# Altium PCB PCI short card universal - 32 BIT.PCBDOC (part 4 of 4)
Units mm, origin at the board's own origin, x right, y up, seen from the top; angles counter-clockwise.
Board outline 174.62 x 106.68 mm, 4 copper layers (TopLayer, MidLayer2, MidLayer3, BottomLayer); 200 components, 306 nets, 1120 pads, 510 vias.
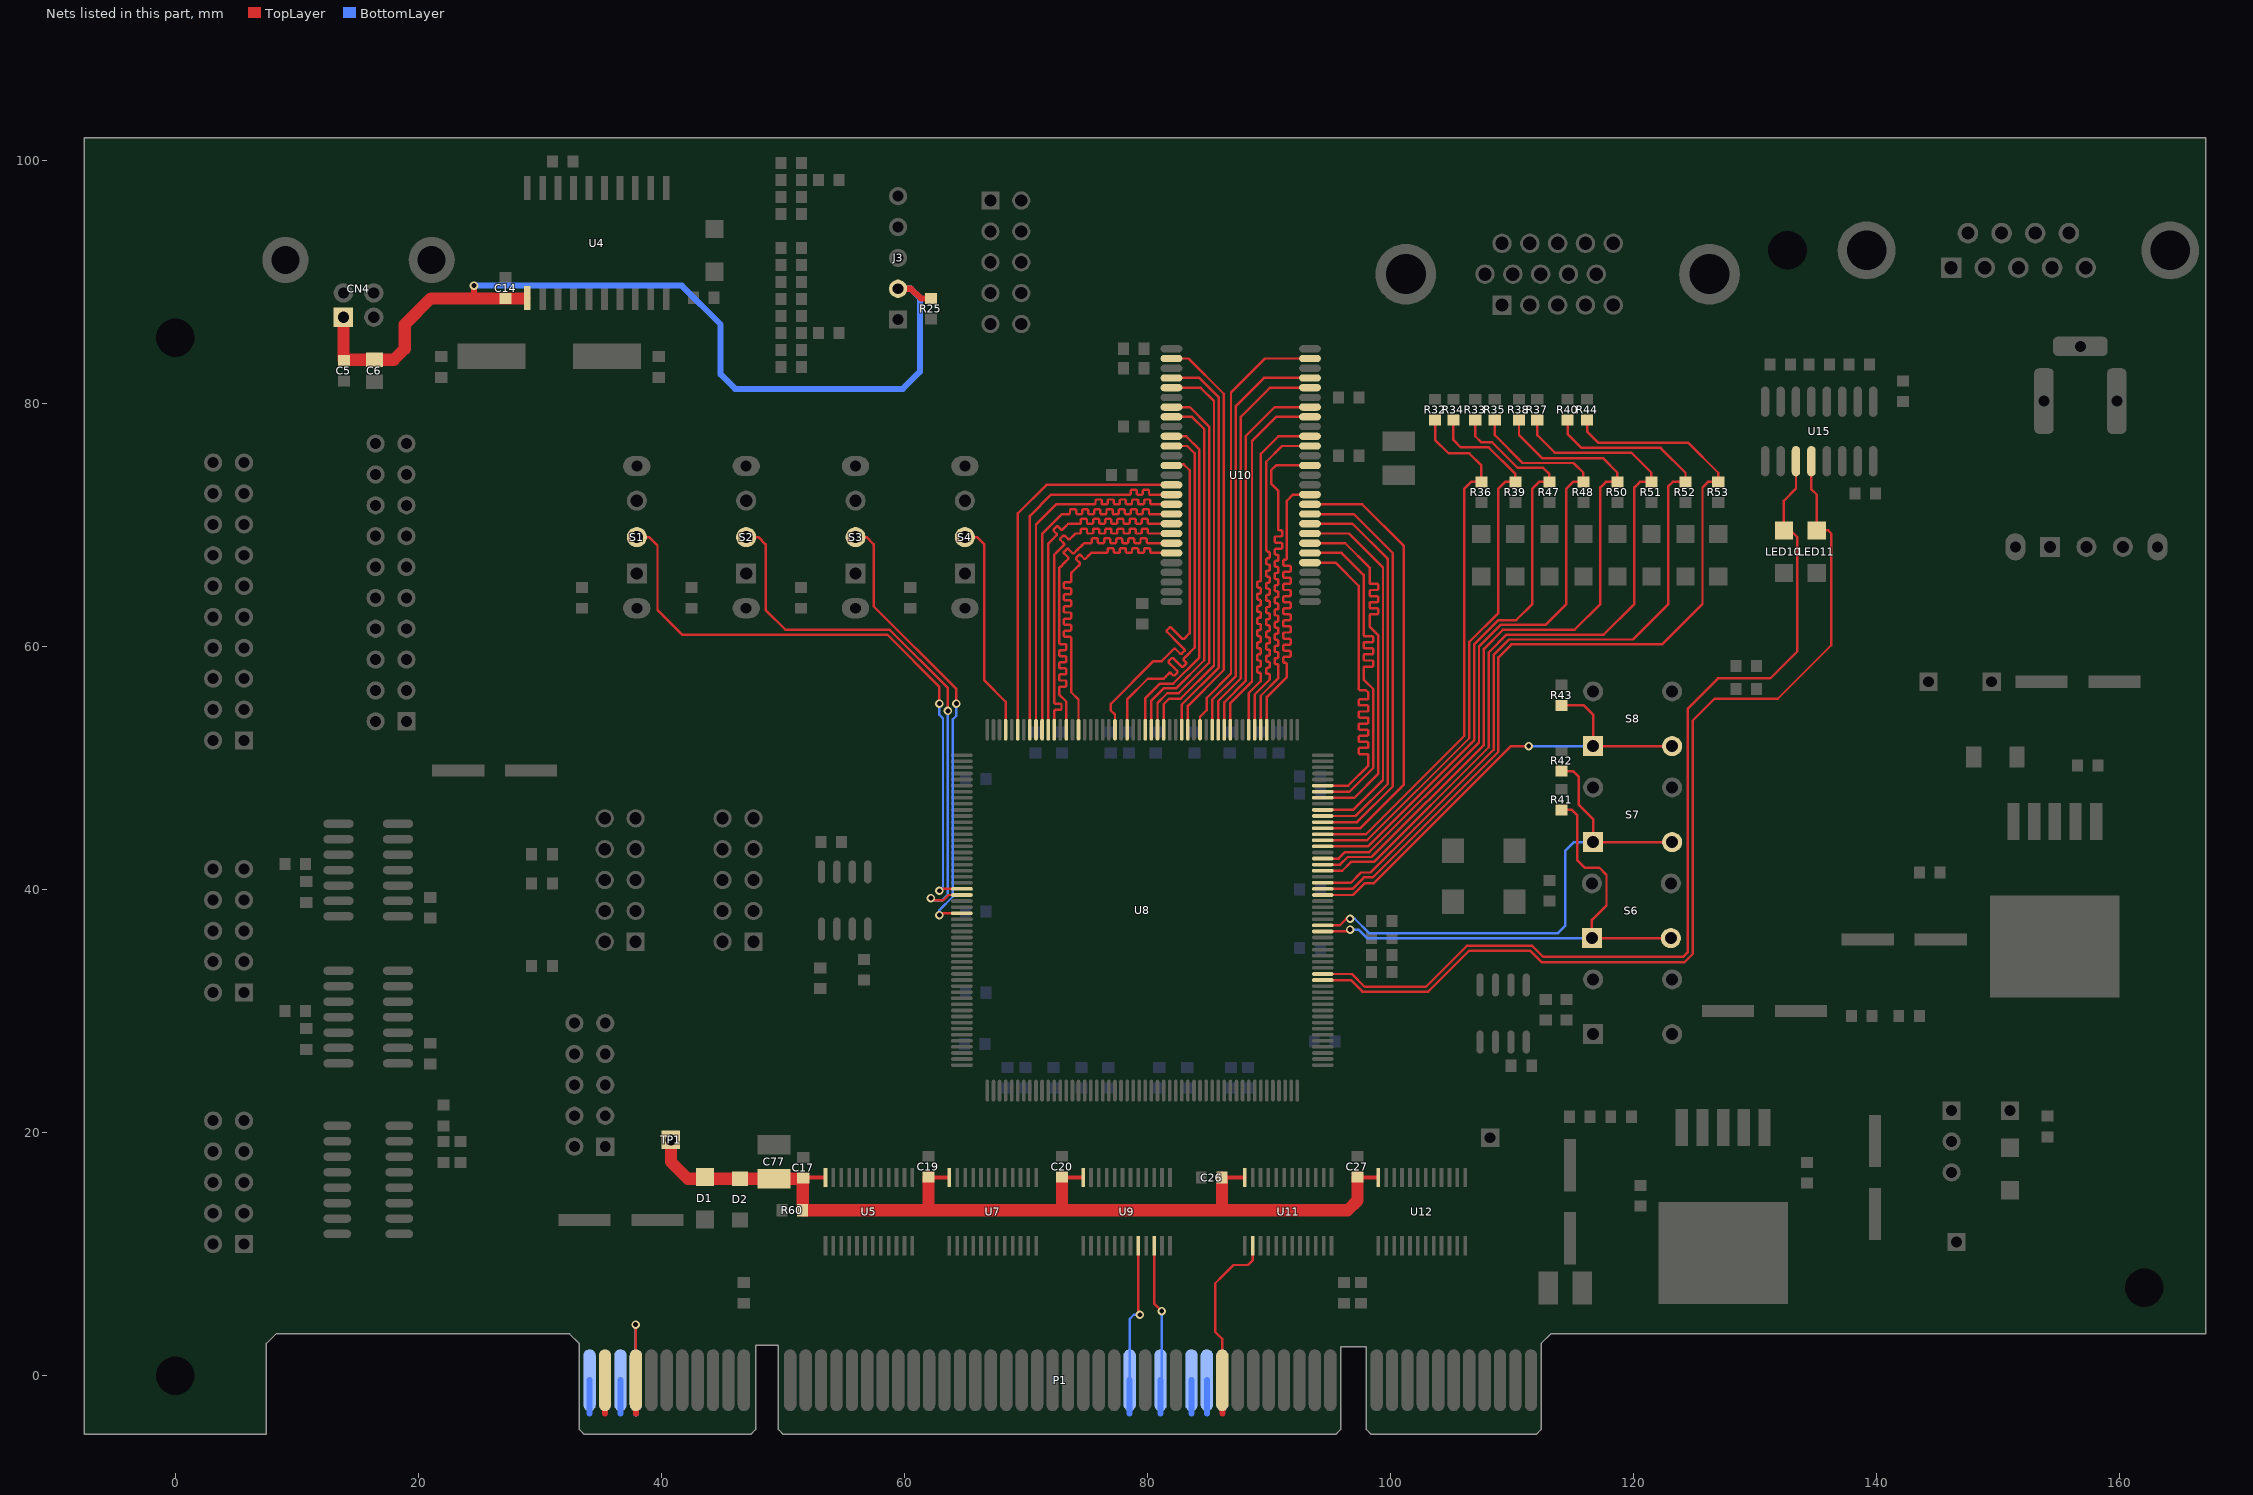
[diagram p6: the nets of this part, all layers, seen from the top]

## Via types
v1: diameter 0.7, hole 0.4, TopLayer to BottomLayer, 476 vias
v2: diameter 0.8, hole 0.5, TopLayer to BottomLayer, 34 vias

## Nets (pads, with @x,y where several pads share a name; then routed paths per layer and width w, separated by ;. In a path a pad name is that pad's centre, name@x,y a point inside that pad or via, vN(x,y) a via of type N, cw(c..) or ccw(c..) an arc to the next point about the centre after c; other vN are vias at no path point) (continued)
SDRAM_A7: U8.151 U10.32 | length 31.8
  TopLayer w0.2: U10.32@93.4,66.9 95.5,66.9 97.4,65 97.4,56.5 97.5,56.4 98,56.4 98.2,56.2 98.2,55.725 98.125,55.65 97.475,55.65 97.4,55.575 97.4,55.225 97.475,55.15 98.125,55.15 98.2,55.075 98.2,54.725 98.125,54.65 97.475,54.65 97.4,54.575 97.4,54.225 97.475,54.15 98.125,54.15 98.2,54.075 98.2,53.725 98.125,53.65 97.475,53.65 97.4,53.575 97.4,53.225 97.475,53.15 98.125,53.15 98.2,53.075 98.2,52.725 98.125,52.65 97.475,52.65 97.4,52.575 97.4,52.225 97.475,52.15 98.125,52.15 98.2,52.075 98.2,51.725 98.125,51.65 97.475,51.65 97.4,51.575 97.4,51.225 97.475,51.15 98.125,51.15 98.2,51.075 98.2,50.2 96.55,48.55 U8.151@94.45,48.55
SDRAM_A8: U8.150 U10.33 | length 30.6
  TopLayer w0.2: U10.33@93.4,67.7 96,67.7 97.807,65.893 97.807,60.925 97.882,60.85 98.532,60.85 98.607,60.775 98.607,60.425 98.532,60.35 97.882,60.35 97.807,60.275 97.807,59.925 97.882,59.85 98.532,59.85 98.607,59.775 98.607,59.425 98.532,59.35 97.882,59.35 97.807,59.275 97.807,58.925 97.882,58.85 98.532,58.85 98.607,58.775 98.607,58.425 98.532,58.35 97.882,58.35 97.807,58.275 97.807,57.293 98.607,56.493 98.607,50.007 96.65,48.05 U8.150@94.45,48.05
SDRAM_A9: U8.149 U10.34 | length 32.1
  TopLayer w0.2: U10.34@93.4,68.5 96.3,68.5 98.3,66.5 98.3,65.2 98.35,65.15 98.932,65.15 99.007,65.075 99.007,64.725 98.932,64.65 98.375,64.65 98.3,64.575 98.3,64.225 98.375,64.15 98.932,64.15 99.007,64.075 99.007,63.725 98.932,63.65 98.375,63.65 98.3,63.575 98.3,63.225 98.375,63.15 98.932,63.15 99.007,63.075 99.007,62.725 98.932,62.65 98.375,62.65 98.3,62.575 98.3,62.15 98.3,61.9 98.3,61.65 99.007,60.943 99.007,49.507 97.05,47.55 U8.149@94.45,47.55
SDRAM_A10: U8.193 U10.22 | length 30.7
  TopLayer w0.2: U8.193@74.35,53.15 74.35,55.631 73.75,56.231 73.75,60 73.75,60.3 73.75,60.725 73.675,60.8 73.225,60.8 73.15,60.875 73.15,61.225 73.225,61.3 73.675,61.3 73.75,61.375 73.75,61.725 73.675,61.8 73.225,61.8 73.15,61.875 73.15,62.225 73.225,62.3 73.675,62.3 73.75,62.375 73.75,62.725 73.675,62.8 73.225,62.8 73.15,62.875 73.15,63.225 73.225,63.3 73.675,63.3 73.75,63.375 73.75,63.725 73.675,63.8 73.225,63.8 73.15,63.875 73.15,64.225 73.225,64.3 73.675,64.3 73.75,64.375 73.75,64.725 73.675,64.8 73.225,64.8 73.15,64.875 73.15,65.225 73.225,65.3 73.675,65.3 73.75,65.375 73.75,65.8 73.75,66.05 73.809,66.109 74.163,66.463 74.463,66.763 74.463,66.869 74.152,67.18 74.152,67.286 74.399,67.534 74.506,67.534 74.817,67.223 74.923,67.223 75.223,67.523 75.4,67.7 75.75,67.7 76.25,67.7 76.675,67.7 76.75,67.775 76.75,68.025 76.825,68.1 77.175,68.1 77.25,68.025 77.25,67.775 77.325,67.7 77.675,67.7 77.75,67.775 77.75,68.025 77.825,68.1 78.175,68.1 78.25,68.025 78.25,67.775 78.325,67.7 78.675,67.7 78.75,67.775 78.75,68.025 78.825,68.1 79.175,68.1 79.25,68.025 79.25,67.775 79.325,67.7 79.675,67.7 79.75,67.775 79.75,68.025 79.825,68.1 80.175,68.1 80.25,68.025 80.25,67.775 80.325,67.7 80.75,67.7 81,67.7 U10.22@82,67.7
SDRAM_A11: U8.147 U10.35 | length 30.6
  TopLayer w0.2: U10.35@93.4,69.3 96.6,69.3 99.407,66.493 99.407,49.007 96.95,46.55 U8.147@94.45,46.55
SDRAM_A12: U8.146 U10.36 | length 32.6
  TopLayer w0.2: U10.36@93.4,70.1 96.9,70.1 99.807,67.193 99.807,48.707 97.15,46.05 U8.146@94.45,46.05
SDRAM_BA0: U8.197 U10.20 | length 30.5
  TopLayer w0.2: U8.197@72.35,53.15 72.35,54.5 72.35,54.725 72.425,54.8 72.875,54.8 72.95,54.875 72.95,55.225 72.875,55.3 72.425,55.3 72.35,55.375 72.35,55.8 72.35,56.3 72.35,56.8 72.35,57.3 72.35,57.8 72.35,58.3 72.35,58.8 72.35,59.3 72.35,59.8 72.35,60.3 72.35,60.8 72.35,61.3 72.35,61.8 72.35,62.3 72.35,62.8 72.35,63.3 72.35,63.8 72.35,64.3 72.35,64.8 72.35,65.3 72.35,65.8 72.35,66.3 72.35,66.8 72.35,67.3 72.35,67.55 72.509,67.709 72.863,68.063 73.163,68.363 73.163,68.469 72.852,68.78 72.852,68.886 73.099,69.134 73.206,69.134 73.517,68.823 73.623,68.823 73.923,69.123 74.1,69.3 74.475,69.3 74.55,69.375 74.55,69.625 74.625,69.7 74.975,69.7 75.05,69.625 75.05,69.375 75.125,69.3 75.475,69.3 75.55,69.375 75.55,69.625 75.625,69.7 75.975,69.7 76.05,69.625 76.05,69.375 76.125,69.3 76.475,69.3 76.55,69.375 76.55,69.625 76.625,69.7 76.975,69.7 77.05,69.625 77.05,69.375 77.125,69.3 77.475,69.3 77.55,69.375 77.55,69.625 77.625,69.7 77.975,69.7 78.05,69.625 78.05,69.375 78.125,69.3 78.475,69.3 78.55,69.375 78.55,69.625 78.625,69.7 78.975,69.7 79.05,69.625 79.05,69.375 79.125,69.3 79.475,69.3 79.55,69.375 79.55,69.625 79.625,69.7 79.975,69.7 80.05,69.625 80.05,69.375 80.125,69.3 80.55,69.3 80.8,69.3 U10.20@82,69.3
SDRAM_BA1: U8.195 U10.21 | length 32
  TopLayer w0.2: U8.195@73.35,53.15 73.35,55.45 72.75,56.05 72.75,56.3 72.75,56.625 72.825,56.7 73.275,56.7 73.35,56.775 73.35,57.125 73.275,57.2 72.825,57.2 72.75,57.275 72.75,57.625 72.825,57.7 73.275,57.7 73.35,57.775 73.35,58.125 73.275,58.2 72.825,58.2 72.75,58.275 72.75,58.625 72.825,58.7 73.275,58.7 73.35,58.775 73.35,59.125 73.275,59.2 72.825,59.2 72.75,59.275 72.75,59.625 72.825,59.7 73.275,59.7 73.35,59.775 73.35,60.125 73.275,60.2 72.825,60.2 72.75,60.275 72.75,60.7 72.75,61.2 72.75,61.7 72.75,62.2 72.75,62.7 72.75,63.2 72.75,63.7 72.75,64.2 72.75,64.7 72.75,65.2 72.75,65.7 72.75,66.2 72.75,66.45 72.855,66.555 73.209,66.909 73.51,67.21 73.51,67.316 73.148,67.677 73.148,67.783 73.396,68.03 73.502,68.03 73.863,67.669 73.969,67.669 74.27,67.97 74.623,68.323 74.8,68.5 74.95,68.5 75.375,68.5 75.45,68.575 75.45,68.825 75.525,68.9 75.875,68.9 75.95,68.825 75.95,68.575 76.025,68.5 76.375,68.5 76.45,68.575 76.45,68.825 76.525,68.9 76.875,68.9 76.95,68.825 76.95,68.575 77.025,68.5 77.375,68.5 77.45,68.575 77.45,68.825 77.525,68.9 77.875,68.9 77.95,68.825 77.95,68.575 78.025,68.5 78.375,68.5 78.45,68.575 78.45,68.825 78.525,68.9 78.875,68.9 78.95,68.825 78.95,68.575 79.025,68.5 79.375,68.5 79.45,68.575 79.45,68.825 79.525,68.9 79.875,68.9 79.95,68.825 79.95,68.575 80.025,68.5 80.45,68.5 80.7,68.5 U10.21@82,68.5
SDRAM_CAS#: U8.200 U10.17 | length 31.9
  TopLayer w0.2: U8.200@70.85,53.15 70.85,70.05 72.5,71.7 75.2,71.7 75.25,71.7 75.675,71.7 75.75,71.775 75.75,72.025 75.825,72.1 76.175,72.1 76.25,72.025 76.25,71.775 76.325,71.7 76.675,71.7 76.75,71.775 76.75,72.025 76.825,72.1 77.175,72.1 77.25,72.025 77.25,71.775 77.325,71.7 77.675,71.7 77.75,71.775 77.75,72.025 77.825,72.1 78.175,72.1 78.25,72.025 78.25,71.775 78.325,71.7 78.675,71.7 78.75,71.775 78.75,72.025 78.825,72.1 79.175,72.1 79.25,72.025 79.25,71.775 79.325,71.7 79.675,71.7 79.75,71.775 79.75,72.025 79.825,72.1 80.175,72.1 80.25,72.025 80.25,71.775 80.325,71.7 80.75,71.7 81,71.7 U10.17@82,71.7
SDRAM_CKE: U8.145 U10.37 | length 34.3
  TopLayer w0.2: U10.37@93.4,70.9 97,70.9 100.207,67.693 100.207,48.482 97.275,45.55 U8.145@94.45,45.55
SDRAM_CLK: U8.144 U10.38 | length 36.9
  TopLayer w0.2: U10.38@93.4,71.7 97.7,71.7 101.1,68.3 101.1,48.6 97.55,45.05 U8.144@94.45,45.05
SDRAM_CS#: U8.198 U10.19 | length 30.7
  TopLayer w0.2: U8.198@71.85,53.15 71.85,68.45 72.1,68.7 72.263,68.863 72.563,69.163 72.563,69.269 72.302,69.53 72.302,69.636 72.549,69.884 72.656,69.884 72.917,69.623 73.023,69.623 73.323,69.923 73.5,70.1 73.55,70.1 74.05,70.1 74.475,70.1 74.55,70.175 74.55,70.425 74.625,70.5 74.975,70.5 75.05,70.425 75.05,70.175 75.125,70.1 75.475,70.1 75.55,70.175 75.55,70.425 75.625,70.5 75.975,70.5 76.05,70.425 76.05,70.175 76.125,70.1 76.475,70.1 76.55,70.175 76.55,70.425 76.625,70.5 76.975,70.5 77.05,70.425 77.05,70.175 77.125,70.1 77.475,70.1 77.55,70.175 77.55,70.425 77.625,70.5 77.975,70.5 78.05,70.425 78.05,70.175 78.125,70.1 78.475,70.1 78.55,70.175 78.55,70.425 78.625,70.5 78.975,70.5 79.05,70.425 79.05,70.175 79.125,70.1 79.475,70.1 79.55,70.175 79.55,70.425 79.625,70.5 79.975,70.5 80.05,70.425 80.05,70.175 80.125,70.1 80.55,70.1 80.8,70.1 U10.19@82,70.1
SDRAM_DQ0: U8.175 U10.2 | length 34.4
  TopLayer w0.2: U10.2@82,83.7 83.4,83.7 86.3,80.8 86.3,58.067 83.35,55.117 U8.175@83.35,53.15
SDRAM_DQ1: U8.176 U10.4 | length 33.2
  TopLayer w0.2: U10.4@82,82.1 84.3,82.1 85.9,80.5 85.9,58.267 82.85,55.217 U8.176@82.85,53.15
SDRAM_DQ2: U8.179 U10.5 | length 33.3
  TopLayer w0.2: U8.179@81.35,53.15 81.35,55.25 81.8,55.7 82.751,55.7 85.5,58.449 85.5,80.2 84.4,81.3 U10.5@82,81.3
SDRAM_DQ3: U8.180 U10.7 | length 31
  TopLayer w0.2: U8.180@80.85,53.15 80.85,55.35 81.65,56.15 82.583,56.15 85.1,58.667 85.1,78.1 83.5,79.7 U10.7@82,79.7
SDRAM_DQ4: U8.181 U10.8 | length 30.3
  TopLayer w0.2: U8.181@80.35,53.15 80.35,55.55 81.35,56.55 82.383,56.55 84.7,58.867 84.7,77.9 83.7,78.9 U10.8@82,78.9
SDRAM_DQ5: U8.182 U10.10 | length 28.3
  TopLayer w0.2: U8.182@79.85,53.15 79.85,55.75 81.05,56.95 82.15,56.95 84.3,59.1 84.3,76.2 83.2,77.3 U10.10@82,77.3
SDRAM_DQ6: U8.185 U10.11 | length 30.9
  TopLayer w0.2: U8.185@78.35,53.15 78.35,55.65 80.05,57.35 81.35,57.35 81.527,57.527 81.827,57.827 81.933,57.827 82.144,57.616 82.251,57.616 82.498,57.864 82.498,57.97 82.234,58.234 81.77,58.698 81.77,58.804 82.017,59.052 82.123,59.052 82.587,58.587 82.852,58.323 82.958,58.323 83.205,58.571 83.205,58.677 82.994,58.888 82.994,58.994 83.15,59.15 83.9,59.9 83.9,75.9 83.3,76.5 U10.11@82,76.5
SDRAM_DQ7: U8.187 U10.13 | length 30.5
  TopLayer w0.2: U8.187@77.35,53.15 77.35,54.39 77.007,54.733 77.007,55.274 80.533,58.8 81.2,58.8 82.21,59.81 82.316,59.81 82.727,59.398 82.833,59.398 83.08,59.646 83.08,59.752 82.616,60.216 81.608,61.224 81.608,61.33 81.856,61.577 81.962,61.577 82.917,60.623 83.023,60.623 83.5,61.1 83.5,74.5 83,75 U10.13@82,75
SDRAM_DQ8: U8.163 U10.42 | length 31.3
  TopLayer w0.2: U8.163@89.35,53.15 89.35,55.95 90.8,57.4 90.8,58.475 90.725,58.55 90.575,58.55 90.5,58.625 90.5,58.975 90.575,59.05 90.725,59.05 90.8,59.125 90.8,59.475 90.725,59.55 90.575,59.55 90.5,59.625 90.5,59.975 90.575,60.05 90.725,60.05 90.8,60.125 90.8,60.475 90.725,60.55 90.575,60.55 90.5,60.625 90.5,60.975 90.575,61.05 90.725,61.05 90.8,61.125 90.8,61.475 90.725,61.55 90.575,61.55 90.5,61.625 90.5,61.975 90.575,62.05 90.725,62.05 90.8,62.125 90.8,62.475 90.725,62.55 90.575,62.55 90.5,62.625 90.5,62.975 90.575,63.05 90.725,63.05 90.8,63.125 90.8,63.475 90.725,63.55 90.575,63.55 90.5,63.625 90.5,63.975 90.575,64.05 90.725,64.05 90.8,64.125 90.8,64.475 90.725,64.55 90.575,64.55 90.5,64.625 90.5,64.975 90.575,65.05 90.725,65.05 90.8,65.125 90.8,65.475 90.725,65.55 90.575,65.55 90.5,65.625 90.5,65.975 90.575,66.05 90.725,66.05 90.8,66.125 90.8,66.475 90.725,66.55 90.575,66.55 90.5,66.625 90.5,66.975 90.575,67.05 90.725,67.05 90.8,67.125 90.8,67.475 90.725,67.55 90.575,67.55 90.5,67.625 90.5,67.975 90.575,68.05 91.025,68.05 91.1,68.125 91.1,68.475 91.025,68.55 90.575,68.55 90.5,68.625 90.5,68.975 90.575,69.05 91.025,69.05 91.1,69.125 91.1,69.475 91.025,69.55 90.875,69.55 90.8,69.625 90.8,72.8 90.2,73.4 90.2,74.5 90.6,74.9 U10.42@93.4,74.9
SDRAM_DQ9: U8.164 U10.44 | length 31.1
  TopLayer w0.2: U8.164@88.85,53.15 88.85,56.05 90.087,57.287 90.087,57.675 90.012,57.75 89.862,57.75 89.787,57.825 89.787,58.175 89.862,58.25 90.012,58.25 90.087,58.325 90.087,58.675 90.012,58.75 89.862,58.75 89.787,58.825 89.787,59.175 89.862,59.25 90.012,59.25 90.087,59.325 90.087,59.675 90.012,59.75 89.862,59.75 89.787,59.825 89.787,60.175 89.862,60.25 90.012,60.25 90.087,60.325 90.087,60.675 90.012,60.75 89.862,60.75 89.787,60.825 89.787,61.175 89.862,61.25 90.012,61.25 90.087,61.325 90.087,61.675 90.012,61.75 89.862,61.75 89.787,61.825 89.787,62.175 89.862,62.25 90.012,62.25 90.087,62.325 90.087,62.675 90.012,62.75 89.862,62.75 89.787,62.825 89.787,63.175 89.862,63.25 90.012,63.25 90.087,63.325 90.087,63.675 90.012,63.75 89.862,63.75 89.787,63.825 89.787,64.175 89.862,64.25 90.012,64.25 90.087,64.325 90.087,64.675 90.012,64.75 89.862,64.75 89.787,64.825 89.787,65.175 89.862,65.25 90.012,65.25 90.087,65.325 90.087,65.675 90.012,65.75 89.862,65.75 89.787,65.825 89.787,66.175 89.862,66.25 90.012,66.25 90.087,66.325 90.087,66.675 90.012,66.75 89.862,66.75 89.787,66.825 89.787,67.175 89.862,67.25 90.012,67.25 90.087,67.325 90.087,67.713 90,67.8 89.9,67.8 89.8,67.9 89.8,75.2 91.1,76.5 U10.44@93.4,76.5
SDRAM_DQ10: U8.165 U10.45 | length 31.2
  TopLayer w0.2: U8.165@88.35,53.15 88.35,56.15 89.35,57.15 89.35,57.6 89.35,57.775 89.275,57.85 89.125,57.85 89.05,57.925 89.05,58.275 89.125,58.35 89.275,58.35 89.35,58.425 89.35,58.775 89.275,58.85 89.125,58.85 89.05,58.925 89.05,59.275 89.125,59.35 89.275,59.35 89.35,59.425 89.35,59.775 89.275,59.85 89.125,59.85 89.05,59.925 89.05,60.275 89.125,60.35 89.275,60.35 89.35,60.425 89.35,60.775 89.275,60.85 89.125,60.85 89.05,60.925 89.05,61.275 89.125,61.35 89.275,61.35 89.35,61.425 89.35,61.775 89.275,61.85 89.125,61.85 89.05,61.925 89.05,62.275 89.125,62.35 89.275,62.35 89.35,62.425 89.35,62.775 89.275,62.85 89.125,62.85 89.05,62.925 89.05,63.275 89.125,63.35 89.275,63.35 89.35,63.425 89.35,63.775 89.275,63.85 89.125,63.85 89.05,63.925 89.05,64.275 89.125,64.35 89.275,64.35 89.35,64.425 89.35,64.775 89.275,64.85 89.125,64.85 89.05,64.925 89.05,65.275 89.125,65.35 89.3,65.35 89.35,65.4 89.35,75.85 90.8,77.3 U10.45@93.4,77.3
SDRAM_DQ11: U8.168 U10.47 | length 30.1
  TopLayer w0.2: U8.168@86.85,53.15 86.85,55.35 88.625,57.125 88.625,76.925 90.6,78.9 U10.47@93.4,78.9
SDRAM_DQ12: U8.169 U10.48 | length 31.2
  TopLayer w0.2: U8.169@86.35,53.15 86.35,55.417 88.1,57.167 88.1,77.3 90.5,79.7 U10.48@93.4,79.7
SDRAM_DQ13: U8.170 U10.50 | length 33.2
  TopLayer w0.2: U8.170@85.85,53.15 85.85,55.517 87.7,57.367 87.7,78.9 90.1,81.3 U10.50@93.4,81.3
SDRAM_DQ14: U8.171 U10.51 | length 34.5
  TopLayer w0.2: U8.171@85.35,53.15 85.35,55.617 87.3,57.567 87.3,79.8 89.6,82.1 U10.51@93.4,82.1
SDRAM_DQ15: U8.173 U10.53 | length 36.5
  TopLayer w0.2: U8.173@84.35,53.15 84.35,54.217 84.9,54.767 84.9,55.767 86.9,57.767 86.9,80.9 89.7,83.7 U10.53@93.4,83.7
SDRAM_DQMH: U8.162 U10.39 | length 30.3
  TopLayer w0.2: U8.162@89.85,53.15 89.85,55.85 91.5,57.5 91.5,58.575 91.425,58.65 91.275,58.65 91.2,58.725 91.2,59.075 91.275,59.15 91.725,59.15 91.8,59.225 91.8,59.575 91.725,59.65 91.275,59.65 91.2,59.725 91.2,60.075 91.275,60.15 91.725,60.15 91.8,60.225 91.8,60.575 91.725,60.65 91.275,60.65 91.2,60.725 91.2,61.075 91.275,61.15 91.725,61.15 91.8,61.225 91.8,61.575 91.725,61.65 91.275,61.65 91.2,61.725 91.2,62.075 91.275,62.15 91.725,62.15 91.8,62.225 91.8,62.575 91.725,62.65 91.275,62.65 91.2,62.725 91.2,63.075 91.275,63.15 91.725,63.15 91.8,63.225 91.8,63.575 91.725,63.65 91.275,63.65 91.2,63.725 91.2,64.075 91.275,64.15 91.725,64.15 91.8,64.225 91.8,64.575 91.725,64.65 91.275,64.65 91.2,64.725 91.2,65.075 91.275,65.15 91.725,65.15 91.8,65.225 91.8,65.575 91.725,65.65 91.275,65.65 91.2,65.725 91.2,66.075 91.275,66.15 91.725,66.15 91.8,66.225 91.8,66.575 91.725,66.65 91.275,66.65 91.2,66.725 91.2,67.075 91.275,67.15 91.425,67.15 91.5,67.225 91.5,72 92,72.5 U10.39@93.4,72.5
SDRAM_DQML: U8.203 U10.15 | length 31.4
  TopLayer w0.2: U8.203@69.35,53.15 69.35,70.95 71.7,73.3 U10.15@82,73.3
SDRAM_RAS#: U8.199 U10.18 | length 31.8
  TopLayer w0.2: U8.199@71.35,53.15 71.35,69.25 73,70.9 73.3,70.9 73.575,70.9 73.65,70.975 73.65,71.225 73.725,71.3 74.075,71.3 74.15,71.225 74.15,70.975 74.225,70.9 74.575,70.9 74.65,70.975 74.65,71.225 74.725,71.3 75.075,71.3 75.15,71.225 75.15,70.975 75.225,70.9 75.575,70.9 75.65,70.975 75.65,71.225 75.725,71.3 76.075,71.3 76.15,71.225 76.15,70.975 76.225,70.9 76.575,70.9 76.65,70.975 76.65,71.225 76.725,71.3 77.075,71.3 77.15,71.225 77.15,70.975 77.225,70.9 77.575,70.9 77.65,70.975 77.65,71.225 77.725,71.3 78.075,71.3 78.15,71.225 78.15,70.975 78.225,70.9 78.575,70.9 78.65,70.975 78.65,71.225 78.725,71.3 79.075,71.3 79.15,71.225 79.15,70.975 79.225,70.9 79.575,70.9 79.65,70.975 79.65,71.225 79.725,71.3 80.075,71.3 80.15,71.225 80.15,70.975 80.225,70.9 80.65,70.9 80.9,70.9 U10.18@82,70.9
SDRAM_WE#: U8.201 U10.16 | length 31.2
  TopLayer w0.2: U8.201@70.35,53.15 70.35,70.75 72.1,72.5 78.3,72.5 78.575,72.5 78.65,72.575 78.65,72.825 78.725,72.9 79.075,72.9 79.15,72.825 79.15,72.575 79.225,72.5 79.575,72.5 79.65,72.575 79.65,72.825 79.725,72.9 80.075,72.9 80.15,72.825 80.15,72.575 80.225,72.5 80.65,72.5 80.9,72.5 U10.16@82,72.5
SERR#: P1.B42 U11.2 | length 16.1
  TopLayer w0.2: P1.B42@86.2,-0.363 P1.B42@86.182,-0.381 86.182,3.018 85.6,3.6 85.6,7.6 86.2,8.2 87.1,9.1 88.3,9.1 88.675,9.475 U11.2@88.675,10.7
  TopLayer w0.5: 86.182,-3.131 P1.B42@86.182,-0.381
SMBCLK: P1.A40 | length 2.8
  BottomLayer w0.5: 83.642,-3.131 P1.A40@83.642,-0.381
SMBDAT: P1.A41 | length 2.8
  BottomLayer w0.5: 84.912,-3.131 P1.A41@84.912,-0.381
STOP#: P1.A38 U9.10 | length 14.1
  TopLayer w0.2: U9.10@80.575,10.7 80.575,5.925 v1(81.2,5.3)
  BottomLayer w0.2: P1.A38@81.102,-0.381 81.2,-0.283 v1(81.2,5.3)
  BottomLayer w0.5: 81.102,-3.131 P1.A38@81.102,-0.381
SW1: R41.2 S6.1 S6.2 U8.127 | length 43.6
  TopLayer w0.2: U8.127@94.45,36.55 96.55,36.55 v1(96.7,36.7) ; R41.2@114.1,46.55 114.95,46.55 115.4,46.1 115.4,42.4 116,41.8 117.2,41.8 117.8,41.2 117.8,38.7 116.6,37.5 S6.1@116.6,36 ; S6.1@115.9,36 S6.2@123.2,36
  BottomLayer w0.2: v1(96.7,36.7) 97.4,36.7 98.1,36 S6.1@116.6,36
SW2: R42.2 S7.1 S7.2 U8.128 | length 43.7
  TopLayer w0.2: U8.128@94.45,37.05 95.85,37.05 96.4,37.6 v1(96.7,37.6) ; R42.2@114.1,49.75 115.05,49.75 115.5,49.3 115.5,47 116.7,45.8 S7.1@116.7,43.9 S7.2@123.2,43.9
  BottomLayer w0.2: v1(96.7,37.6) 97.081,37.6 98.262,36.419 113.819,36.419 114.4,37 114.4,43.167 115.133,43.9 S7.1@116.7,43.9
SW3: S1.2 U8.23 | length 52.1
  TopLayer w0.2: S1.2@37.9,69 39,69 39.7,68.3 39.7,63 41.726,60.974 58.607,60.974 62.9,56.681 v1(62.9,55.3) ; v1(62.9,39.9) 63.05,40.05 U8.23@64.75,40.05
  BottomLayer w0.2: v1(62.9,39.9) 63.2,40.2 63.2,54.081 62.9,54.381 v1(62.9,55.3)
SW4: S2.2 U8.24 | length 46.4
  TopLayer w0.2: S2.2@47,69 48,69 48.6,68.4 48.6,63 50.226,61.374 58.807,61.374 63.6,56.581 v1(63.6,54.7) ; v1(62.2,39.3) 62.4,39.1 63.2,39.1 63.65,39.55 U8.24@64.75,39.55
  BottomLayer w0.2: v1(62.2,39.3) 62.4,39.1 63.1,39.1 63.6,39.6 v1(63.6,54.7)
SW5: S3.2 U8.27 | length 37.6
  TopLayer w0.2: S3.2@56,69 56.9,69 57.5,68.4 57.5,63.3 64.3,56.5 v1(64.3,55.3) ; v1(62.9,37.9) 63.05,38.05 U8.27@64.75,38.05
  BottomLayer w0.2: v1(62.9,37.9) 62.9,38.3 64,39.4 64,54 64.3,54.3 v1(64.3,55.3)
SW6: S4.2 U8.205 | length 17.8
  TopLayer w0.2: S4.2@65,69 66,69 66.6,68.4 66.6,57.2 68.35,55.45 U8.205@68.35,53.15
SW8: R43.2 S8.1 S8.2 U8.133 | length 39.5
  TopLayer w0.2: U8.133@94.45,39.55 96.95,39.55 97.9,40.5 98.633,40.5 105.133,47 109.367,51.233 ; 109.245,51.112 109.933,51.8 v1(111.4,51.8) ; R43.2@114.1,55.15 115.95,55.15 116.7,54.4 S8.1@116.7,51.8 S8.2@123.2,51.8
  BottomLayer w0.2: v1(111.4,51.8) S8.1@116.7,51.8
TCK: P1.B2 | length 2.8
  TopLayer w0.5: 35.382,-3.131 P1.B2@35.382,-0.381
TDIO: P1.A4 P1.B4 | length 14.6
  TopLayer w0.2: P1.B4@37.922,-0.381 v1@37.922,4.2
  TopLayer w0.5: 37.922,-3.131 P1.B4@37.922,-0.381
  BottomLayer w0.2: P1.A4@37.922,-0.381 v1@37.922,4.178
  BottomLayer w0.5: 37.922,-3.131 P1.A4@37.922,-0.381
  other v1: 37.9,4.2
TMS: P1.A3 | length 2.8
  BottomLayer w0.5: 36.652,-3.131 P1.A3@36.652,-0.381
TRDY#: P1.A36 U9.8 | length 14.7
  TopLayer w0.2: U9.8@79.275,10.7 v1@79.275,5.125 ; v1@79.275,5.125 v1(79.4,5) v1@79.275,5.125
  BottomLayer w0.2: P1.A36@78.562,-0.381 78.562,4.662 78.9,5 v1(79.4,5)
  BottomLayer w0.5: 78.562,-3.131 P1.A36@78.562,-0.381
TRST#: P1.A1 | length 2.8
  BottomLayer w0.5: 34.112,-3.131 P1.A1@34.112,-0.381
UART_RX: LED11.2 U8.119 U15.12 | length 82.5
  TopLayer w0.2: U8.119@94.45,32.55 96.762,32.55 97.712,31.6 103.133,31.6 106.507,34.974 111.507,34.974 112.481,34 124.2,34 124.9,34.7 124.9,53.9 126.7,55.7 131.9,55.7 136.3,60.1 136.3,69.3 136.05,69.55 LED11.2@135.1,69.55 135.1,72.5 134.665,72.935 U15.12@134.665,75.25
UART_TX: LED10.2 U8.120 U15.11 | length 80.3
  TopLayer w0.2: U8.120@94.45,33.05 96.85,33.05 97.9,32 102.933,32 106.307,35.374 111.674,35.374 112.595,34.453 124.086,34.453 124.5,34.867 124.5,54.9 126.974,57.374 131.274,57.374 133.5,59.6 133.5,69 132.95,69.55 LED10.2@132.4,69.55 132.4,72 133.395,72.995 U15.11@133.395,75.25
VBUS: C5.2 C6.2 C14.2 CN4.1 J3.2 R25.1 U4.1 | length 83.7
  TopLayer w0.5: 24.6,89 v1(24.6,89.7) ; 25.529,88.679 U4.1@28.985,88.679 ; 26.5,88.9 28.764,88.9 U4.1@28.985,88.679 ; C14.2@26.7,88.4 28.706,88.4 U4.1@28.985,88.679 ; J3.2@59.5,89.44 60.56,89.44 61.35,88.65 R25.1@62.2,88.65
  TopLayer w1: CN4.1@13.85,87.1 13.85,83.6 18,83.6 18.9,84.5 18.9,86.5 21.05,88.65 C14.2@27.2,88.65
  BottomLayer w0.5: v1(24.6,89.7) 41.7,89.7 44.9,86.5 44.9,82.4 46.1,81.2 59.9,81.2 61.3,82.6 61.3,88.7 60.56,89.44 J3.2@59.5,89.44
VCC4V3: C17.2 C19.2 C20.2 C26.2 C27.2 C77.2 D1.2 D2.2 R60.1 TP1.1 U5.24 U7.24 U9.24 U11.24 U12.24 | length 80.6
  TopLayer w0.3: C17.2@51.75,16.3 U5.24@53.5,16.3 ; C19.2@62,16.3 U7.24@63.725,16.3 ; C20.2@73.05,16.3 U9.24@74.725,16.3 ; C26.2@86.15,16.3 U11.24@88.025,16.3 ; C27.2@97.35,16.3 U12.24@99.025,16.3
  TopLayer w1: TP1.1@40.8,19.4 40.8,17.6 42.2,16.2 51.65,16.2 R60.1@51.65,13.6 96.5,13.6 97.3,14.4 C27.2@97.3,16.35 ; 62,13.6 C19.2@62,16.35 ; 73,13.6 C20.2@73,16.35 ; 86.15,13.65 C26.2@86.15,16.3
VGA_B: R38.1 R50.1 U8.138 | length 58.9
  TopLayer w0.2: U8.138@94.45,42.05 95.883,42.05 96.507,42.674 98.474,42.674 107.707,51.907 107.707,59.807 109.274,61.374 115.174,61.374 117.3,63.5 117.3,73.1 117.75,73.55 R50.1@118.7,73.55 118.7,74.3 117.5,75.5 112.5,75.5 110.6,77.4 R38.1@110.6,78.65
VGA_B_2: R37.1 R51.1 U8.137 | length 63.2
  TopLayer w0.2: U8.137@94.45,41.55 96.05,41.55 96.774,42.274 98.674,42.274 108.107,51.707 108.107,59.507 109.574,60.974 117.574,60.974 120.1,63.5 120.1,73.1 120.55,73.55 R51.1@121.5,73.55 121.5,74.3 119.85,75.95 113.55,75.95 112.1,77.4 R37.1@112.1,78.65
VGA_G: R33.1 R47.1 U8.141 | length 50.7
  TopLayer w0.2: U8.141@94.45,43.55 98.183,43.55 106.907,52.274 106.907,60.174 108.908,62.175 110.375,62.175 111.7,63.5 111.7,73 112.25,73.55 R47.1@113.1,73.55 113.1,74.2 112.6,74.7 110.5,74.7 108.4,76.8 107.5,76.8 107,77.3 R33.1@107,78.65
VGA_G_2: R35.1 R48.1 U8.139 | length 55.1
  TopLayer w0.2: U8.139@94.45,42.55 95.75,42.55 96.274,43.074 98.274,43.074 107.307,52.107 107.307,60.006 109.075,61.774 112.774,61.774 114.5,63.5 114.5,73 115.05,73.55 R48.1@115.9,73.55 115.9,74.3 115.1,75.1 110.9,75.1 108.6,77.4 R35.1@108.6,78.65
VGA_HSYNC: R40.1 R52.1 U8.135 | length 66.7
  TopLayer w0.2: U8.135@94.45,40.55 96.75,40.55 97.6,41.4 98.394,41.4 101.994,45 102,45 108.507,51.507 108.507,59.307 109.774,60.574 119.974,60.574 122.9,63.5 122.9,73.2 123.25,73.55 R52.1@124.3,73.55 124.3,74.3 122.25,76.35 115.75,76.35 114.6,77.5 R40.1@114.6,78.65
VGA_R: R32.1 R36.1 U8.143 | length 44.7
  TopLayer w0.2: U8.143@94.45,44.55 98,44.55 106.1,52.65 106.1,73 106.65,73.55 R36.1@107.5,73.55 107.5,74.9 106.5,75.9 104.8,75.9 103.7,77 R32.1@103.7,78.65
VGA_R_2: R34.1 R39.1 U8.142 | length 47.3
  TopLayer w0.2: U8.142@94.45,44.05 98.103,44.05 106.507,52.454 106.507,60.374 108.9,62.767 108.9,73 109.45,73.55 R39.1@110.3,73.55 110.3,74.2 108.1,76.4 105.8,76.4 105.2,77 R34.1@105.2,78.65
VGA_VSYNC: R44.1 R53.1 U8.134 | length 70.5
  TopLayer w0.2: U8.134@94.45,40.05 96.884,40.05 97.834,41 98.566,41 108.907,51.341 108.907,59.107 109.974,60.174 122.374,60.174 125.7,63.5 125.7,73.1 126.15,73.55 R53.1@127,73.55 127,74.3 124.538,76.762 117.138,76.762 116.2,77.7 R44.1@116.2,78.65
pads on no net: CN5.6 CN5.7 CN5.8 CN7.4 CN8.4 CN8.9 CN8.11 CN8.12 CN8.15 CN8.16 CN8.17 CN9.9 CN9.10 CN9.11 J6.0 S1.0 S2.0 S3.0 S4.0 S9.0 S9.3 U2.2 U2.6 U2.7 U3.2 U3.6 U3.7 U4.5 U4.8 U5.1 U7.1 U9.1 U10.40 U11.1 U12.1 U15.7 U15.9
copper on no net: | length 1.3
  TopLayer w0.3: 65.1,23.8 ccw(c65,23.8) 65.1,23.8 ; 94.2,52.8 ccw(c94.1,52.8) 94.2,52.8

## Polygon pours and split planes (outlines as drawn)
5_0V on TopLayer "TopLayer-5V" (solid, remove dead copper, pour order 78): 153.1,69.6 152.5,69 152.5,60.1 151.4,59 151.4,52.6 150.8,52 150.8,50.1 155.3,50.1 155.595,49.805 155.6,44 159,44 159,48.1 158.3,48.8 157.5,48.8 157,49.3 157,55.2 155.8,56.4 155.8,68.934 155.134,69.6
GND on TopLayer "TopLayer-No Net" (solid, remove dead copper, pour order 48): 114,2.6 114,13.1 33.3,13.1 33.3,2.6
GND on TopLayer "TopLayer-GND 11" (solid, remove dead copper, pour order 62): 21.2,5.243 21.2,45.501 26.7,45.501 26.7,54.8 30.1,54.8 31.6,53.316 65,53.415 64.7,23.342 67.85,23.342 68.7,23.342 68.7,5.228
3_3V on TopLayer "TopLayer-3_3V" (solid, pour order 46): 67.3,51.7 66.191,50.591 66.191,27.9 69.1,24.991 92.2,24.991 92.909,25.7 92.909,49.075 90.375,51.609
GND on TopLayer "TopLayer-GND 14" (solid, remove dead copper, pour order 56): 93.3,30.2 93.3,17.9 110.5,17.9 110.5,30.2
GND on TopLayer "TopLayer-GND 14" (solid, remove dead copper, pour order 55): 109.9,12.847 52,12.847 52,26.9 64.1,26.9 64.1,23 95.1,23 95.1,27.3 109.9,27.3
GND on TopLayer "TopLayer-GND 14" (solid, remove dead copper, pour order 54): 117.6,5.228 105.628,5.228 105.6,5.2 105.6,21.6 109.8,21.6 109.8,15.7 111,14.5 117.6,14.5
CABLE_GND on TopLayer "TopLayer-CABLE_GND 4" (solid, remove dead copper, pour order 52): 28.1,90.7 31.5,90.7 31.8,91 31.8,92.4 32.2,92.8 46.5,92.8 46.5,96.374 43.874,96.374 41.7,94.2 35.8,94.2 34.5,95.5 32.4,95.5 31.4,94.5 28.1,94.5
CABLE_GND on TopLayer "TopLayer-CABLE_GND 3" (solid, remove dead copper, pour order 59): 28.3,88.679 21.079,88.679 18.9,86.5 18.9,85 15.5,85 15.5,100.309 31.409,100.309 31.409,99.012 29.188,99.012 29.2,96.7 28.3,96.7
GND on TopLayer "TopLayer-GND 14" (solid, remove dead copper, pour order 58): 115.5,40.8 115.5,32.6 125.6,32.6 125.6,54.7 115.5,54.7
GND on TopLayer "TopLayer-GND 14" (solid, remove dead copper, pour order 57): 108.6,35.374 108.6,18.9 124.1,18.9 124.1,17.1 125.3,17.1 125.6,17.4 125.6,22.6 126.4,22.6 126.8,22.2 127.8,22.2 128.1,22.5 134.5,22.5 134.5,27.3 134.2,27.6 130.3,27.6 128.7,29.2 128.7,35.4
GND on TopLayer "TopLayer-GND 12" (solid, remove dead copper, pour order 63): 27,45 27,79.8 75.7,79.8 75.7,53 64.7,53 64.7,44.9
GND on TopLayer "TopLayer-GND 10" (solid, remove dead copper, pour order 61): 1.6,55.1 1.6,9.174 7.9,9.174 7.9,5.228 23.8,5.228 23.8,55.1
GND on TopLayer "TopLayer-GND 9" (solid, remove dead copper, pour order 60): 28,54.7 28,79.809 1.6,79.809 1.6,54.7
GND on TopLayer "TopLayer-GND 8" (solid, remove dead copper, pour order 82): 74.9,100.309 74.9,51.7 93.15,51.85 93.1,46.9 97.4,48.6 101.076,48.617 105.311,48.625 108,51.5 127.6,51.5 127.6,100.309 126.7,100.309 126,100.309 119.9,100.309 117.9,100.309 112.1,100.309 83.5,100.309 75.7,100.309
GND on TopLayer "TopLayer-GND 7" (solid, remove dead copper, pour order 76): 150.725,57.806 155.594,57.806 155.6,57.8 155.6,62.2 161.65,62.2 161.65,93.1 159.4,93.1 156.9,93.1 150.7,93.2
GND on TopLayer "TopLayer-GND 6" (solid, remove dead copper, pour order 67): 127,71.6 127,100.309 135.7,100.309 148.1,100.309 151.6,100.309 156.563,100.309 156.6,100.272 156.6,71.6
GND on TopLayer "TopLayer-GND 5" (solid, remove dead copper, pour order 68): 143.3,16.3 143.3,5.228 156.518,5.228 156.5,21.4 145.1,21.4 144.8,21.1 144.8,17.5 143.6,16.3
GND on TopLayer "TopLayer-GND 2" (solid, remove dead copper, pour order 77): 156.4,62.7 156.4,57 157.7,55.7 157.7,49.6 157.9,49.4 159.1,49.4 160.3,48.2 160.3,43.2 159.7,42.6 155.7,42.6 155.2,43.1 155.2,47.6 154,47.6 154,41 152.4,39.4 149.3,39.4 149.3,30.3 150.1,29.5 150.1,23.7 150.6,23.2 154.5,23.2 155.1,22.6 155.1,5.228 156.518,5.228 156.518,14.118 161.65,14.118 161.65,62.7
GND on TopLayer "TopLayer-GND 1" (solid, remove dead copper, pour order 70): 126.8,22.2 126.8,15.8 125.5,14.5 113.6,14.5 113,13.9 113,5.8 113.572,5.228 143.6,5.228 143.6,16.3 128.9,16.3 127.9,17.3 127.9,22.2
CABLE_GND on TopLayer "TopLayer-CABLE_GND" (solid, remove dead copper, pour order 86): 29.5,87.1 28.7,86.3 21.3,86.3 20.3,85.3 20.3,81.6 20.9,81 41.1,81 41.6,81.5 41.6,85.6 40.9,86.3 33.2,86.3 32.4,87.1
1_2V on TopLayer "TopLayer-1_2V" (solid, remove dead copper, pour order 85): 125.1,22.2 125.1,18.6 124.6,18.1 117,18.1 115.3,19.8 115.3,22.4 114.5,23.2 110.1,23.2 109.4,22.5 109.4,16.9 111.1,15.2 125.3,15.2 126.3,16.2 126.3,22.2
POWER_3.3V on TopLayer "TopLayer-POWER_3.3V" (solid, remove dead copper, pour order 83): 144.7,42.3 144.7,38.2 143.1,36.6 143.1,22.1 144.3,20.9 154.7,20.9 154.7,22.4 154.3,22.8 150.4,22.8 149.7,23.5 149.7,29.3 148.4,30.6 148.4,39.6 149.2,40.4 152.2,40.4 153.5,41.7 153.5,49.2 153,49.7 149.4,49.7 149.2,49.9 149.2,52 148.9,52.3 147.3,52.3 147,52 147,49.6 147.6,49 152,49 152.395,48.605 152.395,43.795 152,43.4 145.8,43.4
NetJ6_1 on TopLayer "TopLayer-NetJ4_1" (solid, remove dead copper, pour order 71): 151.9,83 151.1,82.2 151.1,74.2 156.2,69.1 156.2,67.4 156.6,67 158.1,67 158.6,67.5 158.6,74 156.7,75.9 156.7,82.5 156.2,83
3_3V on TopLayer "TopLayer-3_3V 2" (solid, remove dead copper, pour order 72): 125.7,48.3 125.3,47.9 125.3,28.5 128.451,25.349 132.16,25.34 133.9,23.6 133.9,22.7 133.3,22.1 128.6,22.1 128.6,17.7 129.2,17.1 143.2,17.1 144,17.9 146.7,17.9 147.4,18.6 147.4,19.8 146.7,20.5 144.1,20.5 142.688,21.912 142.688,24.812 142,25.5 138,25.5 135,28.5 131.2,28.5 130.7,29 130.7,47.9 130.3,48.3
CABLE_GND on TopLayer "TopLayer-CABLE_GND 2" (solid, remove dead copper, pour order 79): 73.7,100.309 73.7,81 45,81 45,100.2
GND on TopLayer "TopLayer-GND 3" (solid, remove dead copper, pour order 74): 98.066,40.1 97.466,39.5 103,39.5 104,40.5 106.2,40.5 106.6,40.1 106.6,37.8 106.4,37.6 103.7,37.6 102.7,38.6 96.7,38.6 96.7,38.5 97,38.2 101.9,38.2 103.5,36.6 113.8,36.6 114.4,37.2 114.4,37.9 112.933,37.9 112.793,38.039 112.239,38.039 111.8,37.6 109.2,37.6 108.9,37.9 108.9,44.4 109.2,44.7 111.3,44.7 111.6,44.4 111.6,40.7 111.9,40.4 114,40.4 114.4,40.8 114.4,43.75 111.85,46.3 105,46.3 103.3,44.6 103.3,41.5 101.9,40.1
3_3V on TopLayer "TopLayer-3_3V 3" (solid, remove dead copper, pour order 65): 21.1,56 21.1,48.9 20.5,48.3 16.6,48.3 15.5,47.2 15.5,45.1 16.3,45.1 16.3,46.3 16.9,46.9 25.2,46.9 25.6,46.9 25.753,47.053 26.002,47.302 26.1,47.4 26.1,56 25.6,56.5 21.6,56.5
GND on TopLayer "TopLayer-GND 4" (solid, remove dead copper, pour order 69): 131.4,47.8 131.4,29.6 131.6,29.4 134.766,29.4 138.266,25.9 142.7,25.9 142.7,28.874 142,28.874 142,36.8 144,38.8 144,42.3 145.7,44 147.9,44 148.506,44.606 148.5,48.7 147.381,48.7 146.6,49.481 146.677,52.377 147.1,52.8 150.934,52.8 151,52.866 151,58.7 152.481,60.081 152.5,72.3 151,72.3 125.3,72.3 125.3,48.7 130.5,48.7
CABLE_GND on TopLayer "TopLayer-CABLE_GND 1" (solid, remove dead copper, pour order 73): 18.4,81 18.4,100.309 5.304,100.309 5.304,91.904 6.696,91.904 6.696,87.596 5.304,87.596 5.304,81
3_3V on MidLayer3 "MidLayer1-3_3V 1" (solid, pour order 53): 131.6,66 21,66 21,52.65 33.8,52.65 33.8,31.1 53.8,31.1 53.8,52.65 124.8,52.65 124.8,42.3 131.6,42.3
+3.3V on MidLayer3 "MidLayer1-+3.3V" (solid, pour order 51): 58.7,9.9 58.7,4.1 103.6,4.1 108.9,9.4 148.8,9.4 148.8,17.9 143.8,17.9 143.8,14 104.1,14 100.1,9.9
3_3V on MidLayer3 "MidLayer1-3_3V" (solid, pour order 50): 88.9,42.1 88.9,29.7 103.5,29.7 109.7,23.5 128.9,23.5 131.4,21 143.1,21 143.1,27.2 135.3,27.2 128.1,34.4 116.4,34.4 116.4,42.1
1_2V on MidLayer3 "MidLayer1-1_2V" (solid, pour order 47): 114.4,23 114.4,18 101.6,18 97.226,22.374 65.9,22.374 65.9,52 93.5,52 93.5,45.6 87.4,45.6 87.4,26.838 104.963,26.838 108.8,23
GND on MidLayer2 "MidLayer2-GND" (solid, remove dead copper, pour order 45): 74.8,102 74.8,79.9 1.5,79.91 1.5,3.4 167.1,3.4 167.1,101.854
GND on BottomLayer "BottomLayer-GND 2" (solid, remove dead copper, pour order 66): 110.3,101.209 99.35,101.209 97.425,101.209 74.9,101.2 74.9,9.6 110.3,9.6
5V on BottomLayer "BottomLayer-5V" (solid, pour order 44): 39.192,6 39.192,9.992 41.5,12.3 108.565,12.3 110.312,10.553 110.312,5.228 111.7,5.228 111.7,11.3 109.4,13.6 41,13.6 37.8,10.4 37.8,6.1
GND on BottomLayer "BottomLayer-GND 1" (solid, remove dead copper, pour order 75): 93.5,4.8 153.4,4.8 153.4,100.309 93.425,100.309 93.4,79.5
GND on BottomLayer "BottomLayer-GND 3" (solid, remove dead copper, pour order 49): 114,2.6 114,13.1 31.6,13.1 31.6,2.6
GND on BottomLayer "BottomLayer-GND" (solid, remove dead copper, pour order 80): 156.507,5.228 156.507,14.118 161.65,14.118 161.65,93.1 160.8,93.1 156.6,93.1 156.57,100.309 150.5,100.309 150.5,5.228
CABLE_GND on BottomLayer "BottomLayer-CABLE_GND" (solid, remove dead copper, pour order 81): 5.304,100.309 5.304,81.004 18.4,81.004 18.4,88 20.2,89.8 41.6,89.8 44.9,86.5 44.9,82.4 46.291,81.009 73.691,81.009 73.691,100.309
CABLE_GND on BottomLayer "BottomLayer-CABLE_GND 1" (solid, remove dead copper, pour order 84): 18.4,83 19.9,83 19.9,87.3 41.9,87.3 41.9,81 19.9,81 19.9,81.8 18.4,81.8
GND on BottomLayer "BottomLayer-GND 4" (solid, remove dead copper, pour order 64): 75.4,79.8 75.5,79.9 75.5,5.228 1.6,5.228 1.6,79.8

## Keep-outs
KeepOutLayer:
  lines w0.203: 162.107,93.567 162.1,93.574 157.007,93.574 157.007,100.711 -5.893,100.711 -5.893,93.091 4.902,93.091 4.902,80.391 -5.893,80.391 -5.893,5.461 6.172,5.461 6.172,4.826 33.223,4.826 33.223,-3.683 47.701,-3.683 47.701,4.191 49.606,4.191 49.606,-3.683 95.961,-3.683 95.961,4.191 97.993,4.191 97.993,-3.683 112.4,-3.683 112.4,4.826 156.972,4.826 156.972,13.716 162.107,13.716 162.107,93.574

## Other copper
TopLayer:
  rectangle: 154.6,87.5 155.6,88.5
  rectangle: 4,6.7 5,7.7
  rectangle: 4,89.2 5,90.2
  pour cut-out: 44.3,15.7 54,15.6 54,12.2 44.3,12.2
  pour cut-out: 37.3,13.8 37.3,11.9 41.5,11.9 41.5,13.8
  pour cut-out: 53.3,17.5 53.3,9.5 60.9,9.5 60.9,17.5
  pour cut-out: 63.5,17.5 63.5,9.5 71.1,9.5 71.1,17.5
  pour cut-out: 5.7,73.8 5.67,54.81 9.91,54.81 10.2,55.1 17.76,55.1 19.04,56.38 19.04,74.16 10.24,74.16 9.88,73.8 5.7,73.8
  pour cut-out: 156.6,89.5 156.6,86.5 153.6,86.5 153.6,89.5
  pour cut-out: 127,73 127,65 107.5,65 107.5,73
  pour cut-out: 140.8,81.9 140.8,73.5 129.8,73.5 129.8,81.9
  pour cut-out: 80.6,85.75 80.6,62.45 94.8,62.45 94.8,85.75
  pour cut-out: 95.6,54.3 95.6,51.9 92.4,51.9 92.4,54.3
  pour cut-out: 93.15,51.6 93.15,24.75 66.05,24.75 66.05,51.85 92.3,51.85 92.3,54.3 63.6,54.3 63.6,22.3 95.6,22.3 95.6,51.6
  pour cut-out: 93.15,51.3 93.15,51.85 92,51.85 92,54.3 95.6,54.3 95.6,51.3
  pour cut-out: 74.5,17.5 74.5,9.5 82.1,9.5 82.1,17.5
  pour cut-out: 87.8,17.5 87.8,9.5 95.4,9.5 95.4,17.5
  pour cut-out: 98.8,17.5 98.8,9.5 106.4,9.5 106.4,17.5
  pour cut-out: 11.7,46.5 11.7,36.7 20.1,36.7 20.1,46.5
  pour cut-out: 11.7,34.4 11.7,24.6 20.1,24.6 20.1,34.4
  pour cut-out: 11.7,21.6 11.7,10.6 20.1,10.6 20.1,21.6
  pour cut-out: 17,46.9 25.2,46.9 25.76,46.34 25.7,45.4 16.3,45.4 16.3,46.3
  pour cut-out: 52.5,42.5 52.5,35.7 57.7,35.7 57.7,42.5
  pour cut-out: 103.1,80.9 103.1,78.1 116.8,78.1 116.8,80.9
  pour cut-out: 106.7,33.2 106.7,26.4 111.9,26.4 111.9,33.2
  pour cut-out: 126.3,22.2 123.3,22.2 123.3,17.9 126.3,17.9
  pour cut-out: 42.8,12.4 42.8,11.5 48.3,11.5 48.8,12 48.8,12.4
  text ".GTL" at 159.563,104.47 h2.29
MidLayer3:
  pour cut-out: 112.6,45.4 103.3,45.4 103.3,36.419 114.4,36.4 114.4,45.4
BottomLayer:
  rectangle: 154.6,87.5 155.6,88.5
  rectangle: 4,89.2 5,90.2
  rectangle: 4,6.7 5,7.7
  pour cut-out: 153.6,89.5 153.6,86.5 156.6,86.5 156.6,89.5
  pour cut-out: 3,91.2 3,88.2 6,88.2 6,91.2
  pour cut-out: 6,5.7 6,8.7 3,8.7 3,5.7
  pour cut-out: 112.6,45.4 103.3,45.4 103.3,36.419 114.4,36.4 114.4,45.4
  text "P/N XXXXXX-XXX REV A" at 26.035,106.934 h1.91
  text ".GBL" at 159.563,104.47 h2.29

## Silkscreen, mask and mechanical layers (free items; w line width, h text height)
TopOverlay:
  drawing of 676 lines, arcs and shapes, not listed
  text ".GTO" at 159.563,104.47 h2.29
  text "PGC" at 55.5,96.7 h0.8
  text "PGD" at 55.6,94.1 h0.8
  text "VSS" at 55.6,91.5 h0.8
  text "VDD" at 55.6,89.1 h0.8
  text "MCLR" at 54.9,86.7 h0.8
  text "1" at 80.053,85.553 h0.8
  text "54" at 95.1,84.3 h0.8
  text "-" at 94.9,80.875 h0.8
  text "-" at 80.005,76.914 h0.8
  text "-" at 94.9,72.9 h0.8
  text "NOT OVER 5V" at 150,72.8 h1.5
  text "-" at 79.955,68.889 h0.8
  text "-" at 94.9,64.9 h0.8
  text "28" at 95.075,63.15 h0.8
  text "OFF" at 162.1,62.8 h1.5
  text "ON" at 149.8,62.7 h1.5
  text "27" at 81.359,61.496 h0.8
  text "GND" at 142.9,59.4 h1
  text "5V" at 148.7,59.4 h1
  text "208" at 65.9,54.9 h0.8
  text "157" at 92.675,54.425 h0.8
  text "-" at 71.25,54.4 h0.8 r90
  text "-" at 76.25,54.4 h0.8 r90
  text "-" at 81.25,54.4 h0.8 r90
  text "-" at 86.25,54.4 h0.8 r90
  text "-" at 91.25,54.4 h0.8 r90
  text "ARIES Board" at 39,54 h1.91
  text "JTAG" at 35.8,51.8 h0.8
  text "CONFIG" at 45.7,51.8 h0.8
  text "1" at 62,51.1 h0.8
  text "156" at 97.3,50.7 h0.8
  text "-" at 95.7,47.65 h0.8
  text "-" at 62.98,46.164 h0.8
  text "-" at 95.7,42.65 h0.8
  text "-" at 62.95,41.15 h0.8
  text "-" at 95.7,37.625 h0.8
  text "-" at 62.95,36.15 h0.8
  text "-" at 95.7,32.65 h0.8
  text "-" at 62.95,31.15 h0.8
  text "J5 setting" at 145.1,29.7 h1
  text "-" at 95.7,27.65 h0.8
  text "EXT_POWER : 1-2" at 145.2,27.3 h1
  text "-" at 61.8,26.15 h0.8
  text "RESET" at 117.8,25.2 h1
  text "PCI_POWER : 2-3" at 145.3,25 h1
  text "105" at 96.1,24.45 h0.8
  text "52" at 62.025,23.45 h0.8
  text "4.3V" at 39.5,23.2 h1
  text "3.3V" at 153,22.9 h1
  text "-" at 70.75,21.675 h0.8 r90
  text "-" at 85.75,21.675 h0.8 r90
  text "-" at 75.75,21.65 h0.8 r90
  text "-" at 80.75,21.65 h0.8 r90
  text "-" at 90.75,21.65 h0.8 r90
  text "1" at 148.1,21.2 h1.27
  text "104" at 92.725,21.125 h0.8
  text "53" at 64.6,21.1 h0.8
  text "1.2V" at 102.7,19.3 h1
  text "3" at 148,16 h1.27
  text "PCI3.3V" at 142.6,6.3 h1
BottomOverlay:
  drawing of 6137 lines, arcs and shapes, not listed
  text "1" at 67.2,98.2 h1.27
  text "2" at 70.1,98.2 h1.27
  text "PGC" at 57.7,96.7 h0.8
  text "6" at 147.7,95.8 h1.52
  text "9" at 156.6,95.7 h1.52
  text "PGD" at 57.7,94 h0.8
  text "15" at 121.8,92.8 h1.52
  text "11" at 107.9,92.7 h1.52
  text "VSS" at 57.7,91.5 h0.8
  text "VDD" at 57.7,89.1 h0.8
  text "1" at 146.3,87.8 h1.52
  text "5" at 159.1,87.7 h1.52
  text "MCLR" at 57.8,86.7 h0.8
  text "1" at 107.9,86.1 h1.52
  text "5" at 119.6,85.6 h1.52
  text "9" at 67.4,83.5 h1.27
  text "10" at 70.8,83.5 h1.27
  text "20" at 17.3,78.3 h1.27
  text "19" at 20.1,78.3 h1.27
  text "20" at 4.1,76.4 h1.27
  text "19" at 6.8,76.4 h1.27
  text "2" at 16.6,50.8 h1.27
  text "1" at 19.5,50.7 h1.27
  text "2" at 3.5,49.6 h1.27
  text "1" at 5.9,49.5 h1.27
  text "9" at 38.3,47.6 h1.27
  text "10" at 45.8,47.6 h1.27
  text "9" at 48,47.6 h1.27
  text "10" at 36.2,47.5 h1.27
  text "10" at 3.8,43.2 h1.27
  text "9" at 6.2,43.2 h1.27
  text "2" at 35.7,33 h1.27
  text "1" at 38.1,33 h1.27
  text "2" at 45.5,32.9 h1.27
  text "1" at 48,32.9 h1.27
  text "10" at 33.5,30.5 h1.27
  text "9" at 36,30.5 h1.27
  text "2" at 3.2,28.8 h1.27
  text "1" at 6.2,28.8 h1.27
  text "10" at 4,22.1 h1.27
  text "9" at 6.3,22.1 h1.27
  text "1" at 148.6,21.2 h1.27
  text "Jumper setting" at 143,20.5 h1
  text "ARIES Board" at 61,20 h1.91
  text "J5" at 125.5,17.5 h1
  text "Application" at 143,17.5 h1
  text "2" at 33,16 h1.27
  text "1" at 35.8,16 h1.27
  text "3" at 148.8,16 h1.27
  text "REV A2" at 61,15 h1.91
  text "1-2" at 126,14.5 h1
  text "FPGA stand alone" at 143,14.5 h1
  text "2-3" at 126,11.5 h1
  text "PCI Card" at 143,11.5 h1
  text "S/N" at 61,10 h1.91
  text "1" at 7.3,8.7 h1.27
  text "2" at 2.7,8.6 h1.27
TopPaste:
  text ".GTP" at 159.563,104.47 h2.29
BottomPaste:
  text ".GBP" at 159.563,104.47 h2.29
TopSolder:
  rectangle: 32.715,-5.334 112.852,2.286
  text ".GTS" at 159.563,104.47 h2.29
BottomSolder:
  rectangle: 32.715,-5.334 112.852,2.286
  text ".GBS" at 159.563,104.47 h2.29
Mechanical1:
  lines w0.508: 32.461,3.429 33.274,2.616 33.274,-4.445 33.655,-4.826 47.396,-4.826 47.777,-4.445 47.777,2.489 49.657,2.489 49.657,-4.445 50.038,-4.826 95.529,-4.826 95.91,-4.445 95.91,2.362 98.044,2.362 98.044,-4.445 98.425,-4.826 112.039,-4.826 112.42,-4.445 112.42,2.642 113.208,3.429 167.132,3.429 167.132,101.854 -7.493,101.854 -7.493,-4.826 7.518,-4.826 7.518,2.642 8.306,3.429 32.487,3.429
Mechanical4:
  circle w0.254: c32.605,-3.7 r2.54
  lines w0.203: 189.103,28.702 193.548,28.702 193.548,21.209 ; 191.643,16.002 201.803,16.002 ; 191.643,21.082 200.533,21.082 ; 193.548,8.382 193.548,15.875 ; 195.77,7.747 203.263,7.747 ; 197.675,47.117 205.486,47.117 ; 203.391,5.842 203.391,14.732 ; 204.025,5.842 204.025,14.732 ; 205.613,41.402 205.613,49.022 ; 206.248,22.352 213.233,47.752 ; 211.645,7.747 204.153,7.747 ; 220.084,43.182 212.745,45.853 ; 193.548,15.875 194.183,12.065 192.913,12.065 193.548,15.875 ; 193.548,21.209 194.183,25.019 192.913,25.019 193.548,21.209 ; 203.263,7.747 199.453,8.382 199.453,7.112 203.263,7.747 ; 204.153,7.747 207.963,8.382 207.963,7.112 204.153,7.747 ; 205.486,47.117 201.676,47.752 201.676,46.482 205.486,47.117 ; 212.745,45.853 216.542,45.147 216.108,43.953 212.745,45.853 ; 193.04,12.192 194.056,12.192 193.548,15.621 193.04,12.192 ; 193.04,24.892 194.056,24.892 193.548,21.463 193.04,24.892 ; 193.167,12.319 193.929,12.319 193.548,15.367 193.167,12.319 ; 193.167,24.765 193.929,24.765 193.548,21.717 193.167,24.765 ; 193.294,12.446 193.548,15.113 193.802,12.446 193.294,12.446 ; 193.294,24.638 193.802,24.638 193.548,21.971 193.294,24.638 ; 193.421,12.573 193.548,14.859 193.675,12.573 193.421,12.573 ; 193.421,24.511 193.675,24.511 193.548,22.225 193.421,24.511 ; 199.581,7.239 203.01,7.747 199.581,8.255 199.581,7.239 ; 199.707,7.366 202.755,7.747 199.707,8.128 199.707,7.366 ; 199.834,7.493 202.501,7.747 199.834,8.001 199.834,7.493 ; 199.962,7.62 199.962,7.874 202.248,7.747 199.962,7.62 ; 201.803,21.082 203.391,16.002 204.025,16.002 205.613,21.082 205.613,40.45 204.66,40.45 204.66,42.672 203.073,38.862 202.755,40.45 201.803,40.45 201.803,21.082 ; 201.803,46.609 205.232,47.117 201.803,47.625 201.803,46.609 ; 201.93,46.736 204.978,47.117 201.93,47.498 201.93,46.736 ; 202.057,46.863 202.057,47.371 204.724,47.117 202.057,46.863 ; 202.184,46.99 202.184,47.244 204.47,47.117 202.184,46.99 ; 204.406,7.747 207.835,8.255 207.835,7.239 204.406,7.747 ; 204.66,7.747 207.708,8.128 207.708,7.366 204.66,7.747 ; 204.915,7.747 207.582,8.001 207.582,7.493 204.915,7.747 ; 205.168,7.747 207.454,7.874 207.454,7.62 205.168,7.747 ; 212.983,45.766 216.379,45.071 216.032,44.116 212.983,45.766 ; 213.222,45.679 216.216,44.995 215.956,44.279 213.222,45.679 ; 213.461,45.592 216.054,44.919 215.88,44.442 213.461,45.592 ; 213.699,45.506 215.891,44.843 215.804,44.604 213.699,45.506
  lines w0.254: 28.998,-5.046 29.506,-4.919 28.998,-3.649 28.998,-5.046 ; 29.003,-3.654 29.549,-2.368 29.032,-2.286 29.003,-3.654
  text ".Pcb_File_Name_No_Path" at 111.303,109.296 h2.29
  text ".Printout_Name" at 111.303,104.47 h2.29
  text "DETAIL A" at 194.183,54.102 h3.81
  text "o" at 211.328,48.069 h1.22
  text "20" at 207.201,45.529 h2.29
  text "0.071" at 179.895,27.432 h2.29
  text "+.010" at 180.213,23.622 h1.91
  text "-.015" at 180.213,19.812 h1.91
  text "0.010" at 213.233,6.477 h2.29
  text "+.005" at 213.233,2.667 h1.91
  text "-.010" at 213.233,-1.143 h1.91
  text "SEE DETAIL A" at 10.033,-4.826 h1.91
DrillDrawing:
  text ".LEGEND" at 175.514,75.819 h2.29
  text "Drilling Details." at 175.514,72.009 h2.29

## Dimensions
-8.001,0 to -7.493,-4.826 on Mechanical4
0,-5.334 to -7.493,-4.826 on Mechanical4